# EAGLE board Estacion quimica (EAGLE 9.6.2)
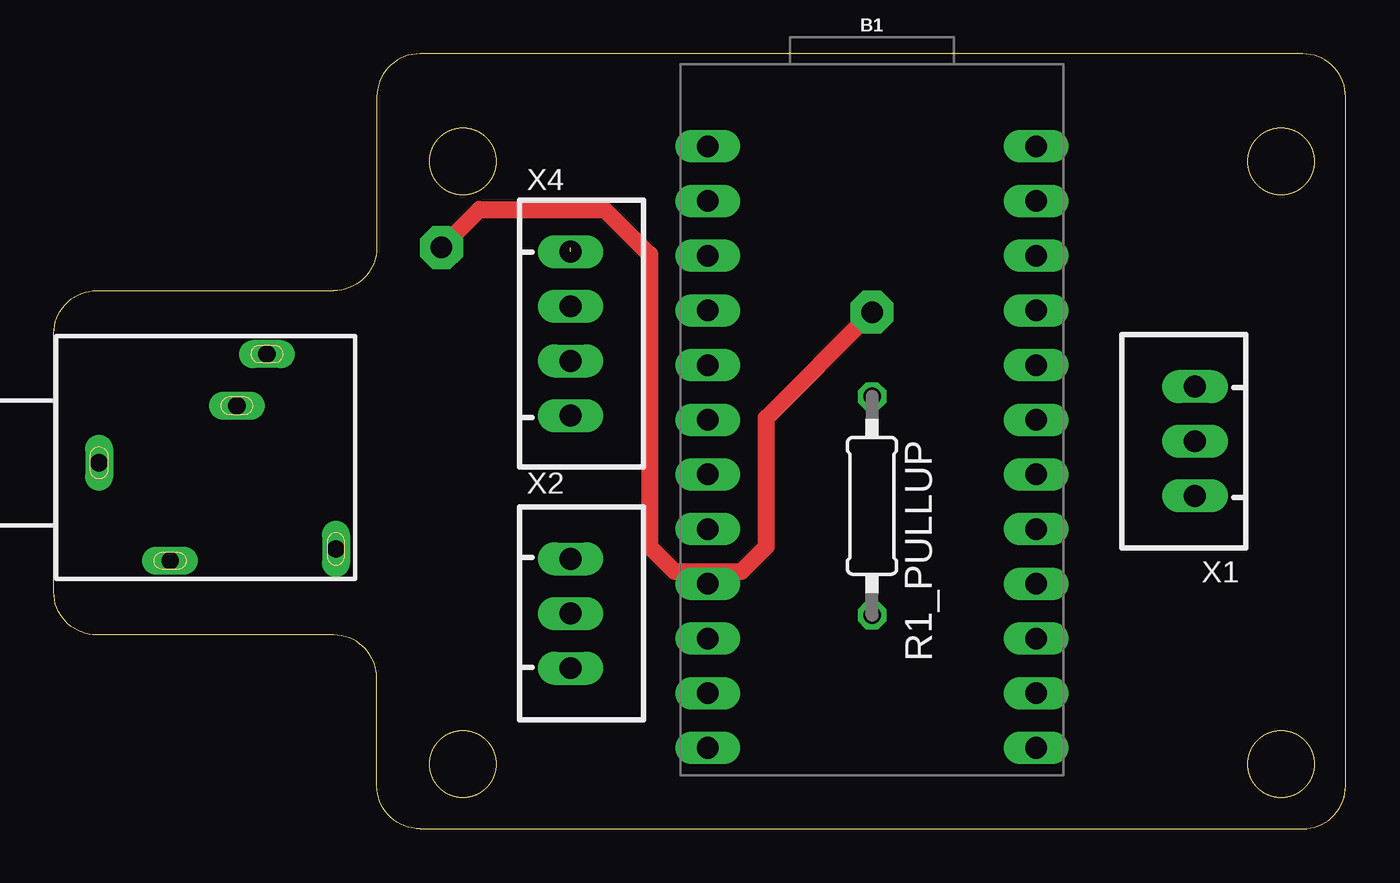
[diagram p0: board, top side]
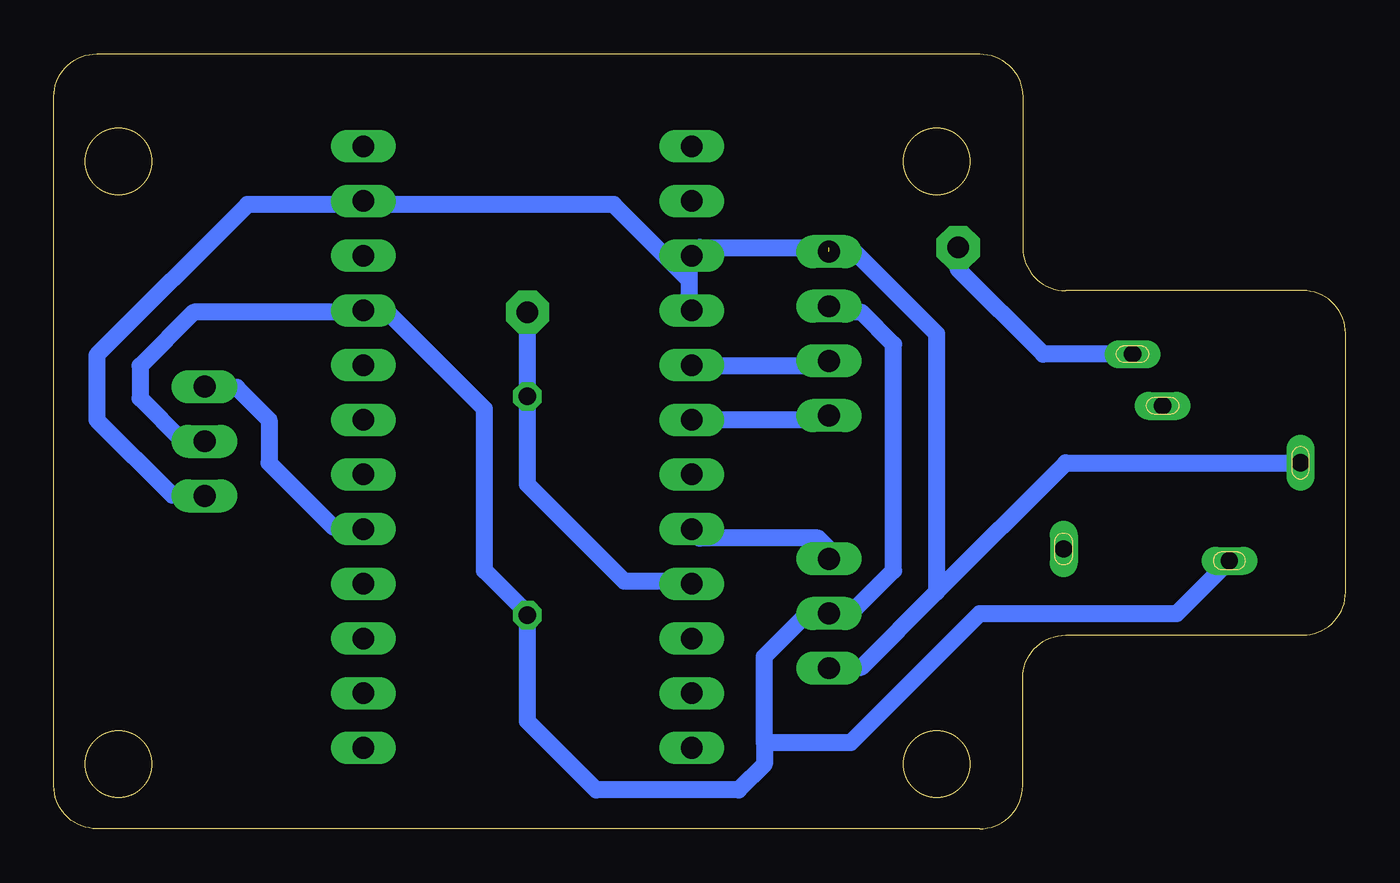
[diagram p1: board, bottom side, seen from below]

Size 60 x 36 mm. Coordinates in mm from the lower left corner, seen from the top.
Outline: 17,0 58,0 arc90 60,2 60,34 arc90 58,36 17,36 arc90 15,34 15,27 arc-90 13,25 2,25 arc90 0,23 0,11 arc90 2,9 13,9 arc-90 15,7 15,2 arc90 17,0
Copper layers (1*16): Top 0.035mm / dielectric 1.5mm / Bottom 0.035mm
Design rules "default *": minimum track width 0.8mm, minimum drill 0.8mm, track to track 0.8mm, track to pad 0.8mm, pad to pad 0.8mm, via to via 0.8mm, smd to smd 6mil, copper to edge 0.1mm, drill to drill 6mil, minimum pad ring 10mil, minimum via ring 8mil, stop-mask expansion 4mil, vias tented up to drill 0mil, thermal gap 10mil
Milling: area 55.5,29.4 to 58.5,32.5; area 55.5,1.4 to 58.5,4.5; area 17.4,29.4 to 20.6,32.5; area 17.4,1.4 to 20.6,4.5

## Footprints (pad centres in the part's own frame; a part is rotated, then mirrored left to right if it is on the bottom)
SPARKFUN_PRO_MICRO = drill 1 pad 1.3 long: 1 -7.62,12.7; 2 -7.62,10.16; 3 -7.62,7.62; 4 -7.62,5.08; 5 -7.62,2.54; 6 -7.62,0; 7 -7.62,-2.54; 8 -7.62,-5.08; 9 -7.62,-7.62; 10 -7.62,-10.16; 11 -7.62,-12.7; 12 -7.62,-15.24; 13 7.62,-15.24; 14 7.62,-12.7; 15 7.62,-10.16; 16 7.62,-7.62; 17 7.62,-5.08; 18 7.62,-2.54; 19 7.62,0; 20 7.62,2.54; 21 7.62,5.08; 22 7.62,7.62; 23 7.62,10.16; 24 7.62,12.7
0207/10 = drill 0.813 octagon: 1 -5.08,0; 2 5.08,0
JST-XH-03-PACKAGE-LONG-PAD = drill 1.016 long: 1 -2.54,0; 2 0,0; 3 2.54,0
JST-XH-04-PACKAGE-LONG-PAD = drill 1.016 long: 1 -3.81,0; 2 -1.27,0; 3 1.27,0; 4 3.81,0
1503_09 = drill 0.8 pad 1.2 long: 1 0,-2.1; 2 -4.55,-5.4; 3 5.05,-9.9; 4 -4,-13.1; 5 2.65,-8.5

## Placement (x,y rotation side)
B1  SPARKFUN_PRO_MICRO  [SPARKFUN_PRO_MICRO]  38,19 0 top
R1_PULLUP  4.7k  [0207/10]  38,15 270 top
X1  SONDA_PH  [JST-XH-03-PACKAGE-LONG-PAD]  53,18 90 top
X2  LED  [JST-XH-03-PACKAGE-LONG-PAD]  24,10 270 top
X4  I2C  [JST-XH-04-PACKAGE-LONG-PAD]  24,23 270 top
X5  1503_09  [1503_09]  0,17 90 top

## Library data of the parts
B1 = Arduino pcbs
R1_PULLUP = rcl; SPICEPREFIX: R
X1 X2 X4 = Rembrandt Electronics - JST XH Connectors v1-0
X5 = con-lumberg; OC_FARNELL: 1243244; OC_NEWARK: unknown

## Nets
A_SONDA: B1.17 X1.3
D_LED: B1.8 X2.1
D_TEMP: B1.9 R1_PULLUP.1 X5.3
GND: B1.3 B1.4 B1.23 X1.1 X2.3 X4.1 X5.1
RAW: B1.24
SCL: B1.6 X4.4
SDA: B1.5 X4.3
VCC: B1.21 R1_PULLUP.2 X1.2 X2.2 X4.2 X5.2

## Tracks (layer width: path | path; a pad name or v marks a point on that pad's centre or on a via)
A_SONDA
  Bottom 0.8: B1.17 46,14 47,14 50,17 50,19 51.5,20.5 53,20.5 X1.3
D_LED
  Bottom 0.8: B1.8 30,13.5 24.5,13.5 24,13 X2.1
D_TEMP  (via drill 1 pad 2)
  Top 0.8: v38,24 33.09,19.09 33.09,13.11 31.94,11.97 28.82,11.97 27.67,13.11 27.67,26.68 25.57,28.77 19.77,28.77 v18,27
  Bottom 0.8: B1.9 30.5,11.5 33.5,11.5 38,16 R1_PULLUP.1 v38,24 | X5.3 14.05,22.05 18,26 v18,27
GND  (1 unrouted)
  Bottom 0.8: X5.1 13,17 19,11 | 19,11 22.5,7.5 24,7.5 X2.3 | 30.5,25.5 30.5,26.5 B1.3 30,27 24,27 | 30.5,25.5 30.5,24.5 B1.4 | 30.5,25.5 34,29 45.5,29 B1.23 46,29 51,29 58,22 58,19 54.5,15.5 53,15.5 X1.1 | X4.1 22.81,26.81 19,23 19,11
SCL
  Bottom 0.8: B1.6 24,19 X4.4
SDA
  Bottom 0.8: B1.5 30,21.5 24,21.5 X4.3
VCC
  Bottom 0.8: X4.2 24,24 22.5,24 21,22.5 21,12 23,10 X2.2 25,10 27,8 27,4 | X1.2 54,18 56,20 56,21.5 53.5,24 46,24 B1.21 45.5,24 44.5,24 40,19.5 40,12 38,10 R1_PULLUP.2 38,5 34.81,1.81 28.19,1.81 27,3 27,4 | 27,4 23,4 17,10 7.85,10 X5.2